# Allegro board DOEON_PCBv2.brd
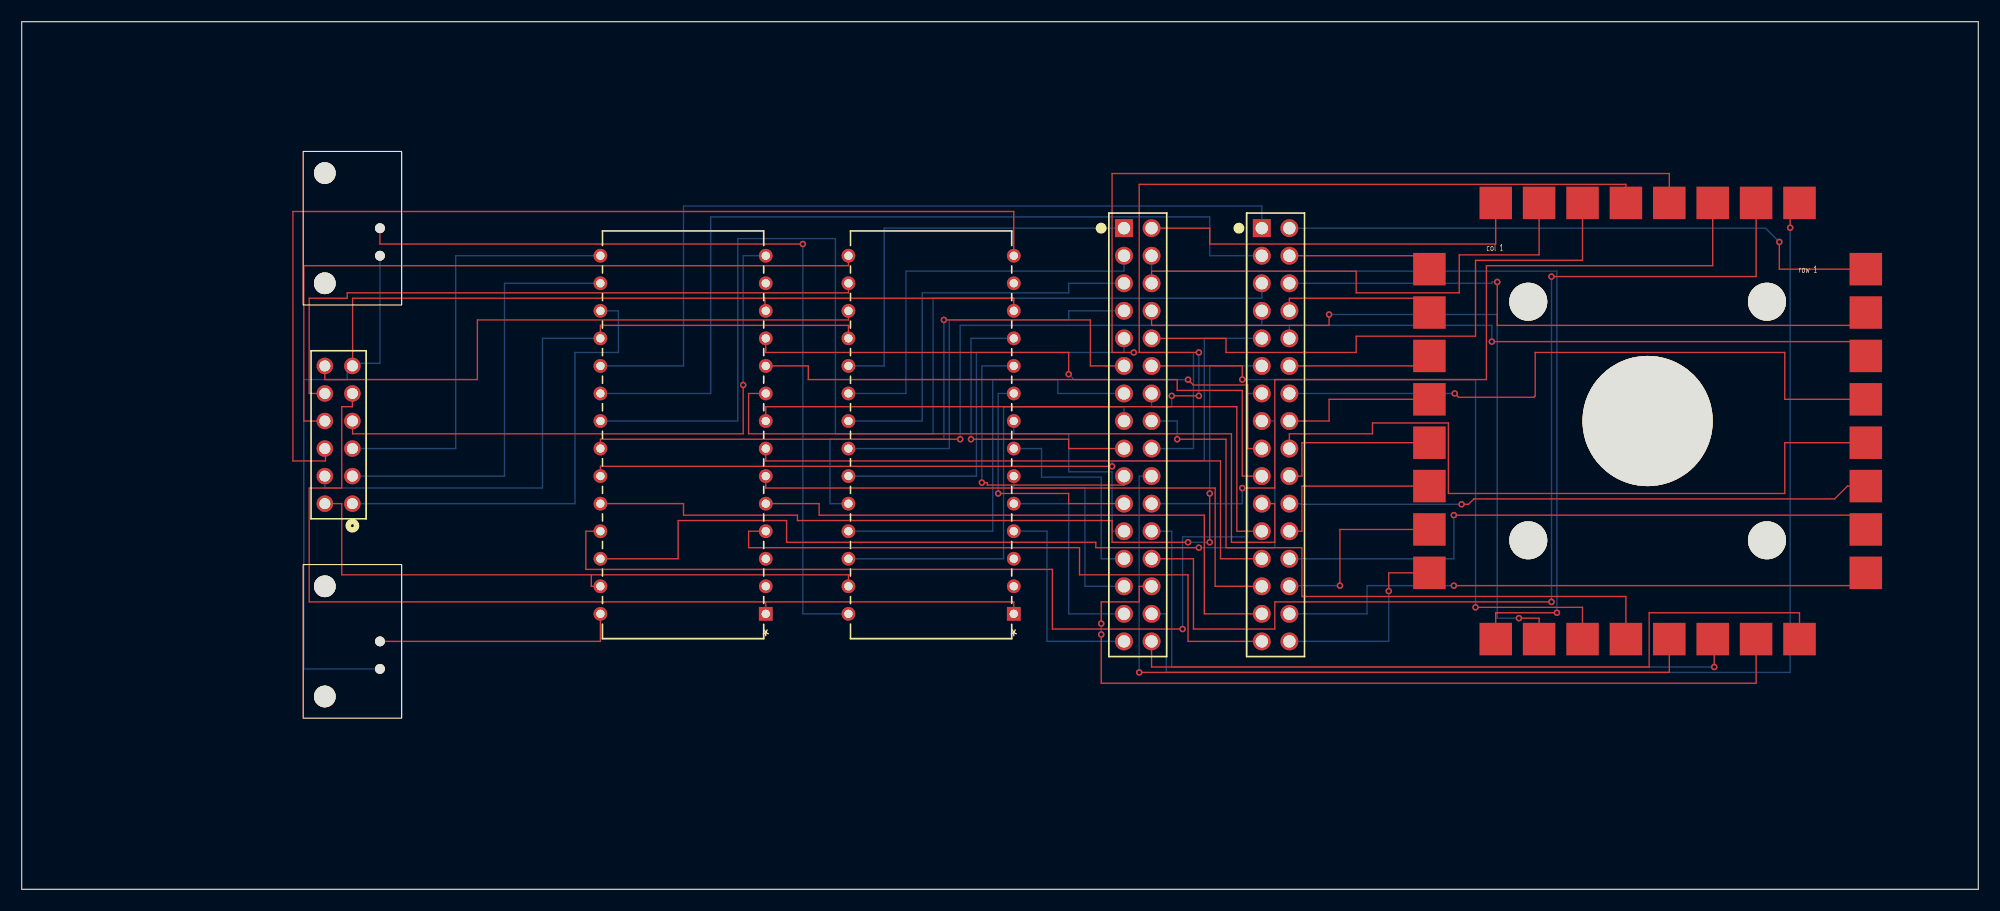
[diagram p0: board, top side]
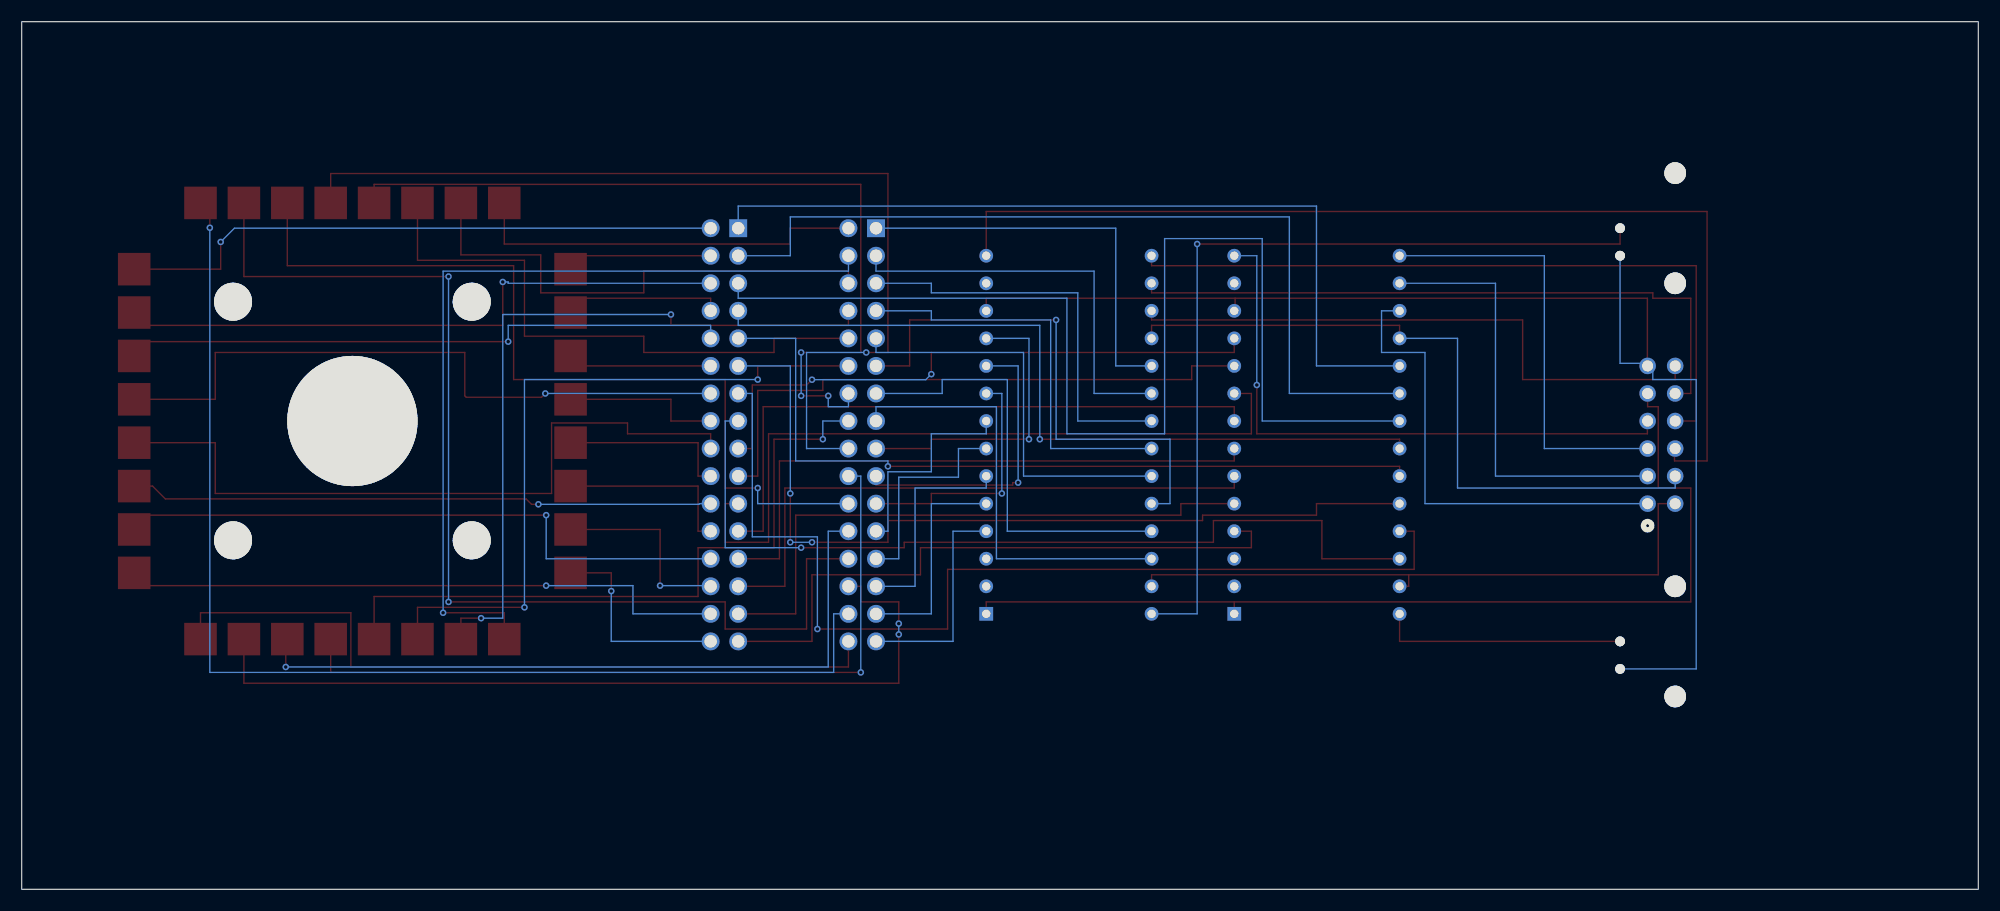
[diagram p1: board, bottom side, seen from below]

Outline 180.34 x 80 mm; copper layers: TOP, BOTTOM. Coordinates in mm from the lower left corner of the outline.
Outline path: rectangle 0,0 180.34,80

## Design rules (mm)
constraint set DEFAULT: min track width 0.127

## Placement (name value [footprint] x y rotation side)
J1  67997-212HLF  [12PINS]  30.48 35.56 90 top
J2  -  [TSW-116-07-G-D]  114.3 60.96 270 top
J3  -  [TSW-116-07-G-D]  101.6 60.96 270 top
SAMPLE1  sample_holder  [SAMPLE_MOUNT]  149.86 43.18 0 top
U1  MAX396EPI  [21-0044B_28]  68.58 25.4 180 top
U2  MAX396EPI  [21-0044B_28]  91.44 25.4 180 top
VBI1  VBI211  [BNC_YB]  27.94 27.94 90 top
VBI2  VBI211  [BNC_YB]  27.94 66.04 90 top

## Library data of the parts
J1 = 67997-212HLF: User Part Number: PN; Tolerance: TOL
J2 J3 = TSW-116-07-G-D: User Part Number: PN; Tolerance: TOL
SAMPLE1 = sample_holder
U1 U2 = MAX396EPI: User Part Number: PN; Tolerance: TOL
VBI1 VBI2 = VBI211

## Footprints (pads in the part's own frame, mm; a bottom-side part is the same pattern mirrored in y, then rotated)
12PINS
  round 1.524 hole 1.016: A1(0,0) A2(2.54,0) A3(5.08,0) A4(7.62,0) A5(10.16,0) A6(12.7,0) B1(0,2.54) B2(2.54,2.54) B3(5.08,2.54) B4(7.62,2.54) B5(10.16,2.54) B6(12.7,2.54)
21-0044B_28
  rect 1.27x1.27 hole 0.762: 1(0,0)
  round 1.27 hole 0.762: 2(0,-2.54) 3(0,-5.08) 4(0,-7.62) 5(0,-10.16) 6(0,-12.7) 7(0,-15.24) 8(0,-17.78) 9(0,-20.32) 10(0,-22.86) 11(0,-25.4) 12(0,-27.94) 13(0,-30.48) 14(0,-33.02) 15(15.24,-33.02) 16(15.24,-30.48) 17(15.24,-27.94) 18(15.24,-25.4) 19(15.24,-22.86) 20(15.24,-20.32) 21(15.24,-17.78) 22(15.24,-15.24) 23(15.24,-12.7) 24(15.24,-10.16) 25(15.24,-7.62) 26(15.24,-5.08) 27(15.24,-2.54) 28(15.24,0)
BNC_YB
  round 0.9 hole 0.9: 1(-7.62,-5.08) 2(-5.08,-5.08)
  round 2 hole 2: 3(-10.16,0) 4(0,0)
SAMPLE_MOUNT
  rect 3x3 smd: 1(20.11,14) 2(-20.11,14) 3(20.11,10) 4(-20.11,10) 5(20.11,6) 6(-20.11,6) 7(20.11,2) 8(-20.11,2) 9(20.11,-2) 10(-20.11,-2) 11(20.11,-6) 12(-20.11,-6) 13(20.11,-10) 14(-20.11,-10) 15(20.11,-14) 16(-20.11,-14) 17(-14,20.11) 18(-14,-20.11) 19(-10,20.11) 20(-10,-20.11) 21(-6,20.11) 22(-6,-20.11) 23(-2,20.11) 24(-2,-20.11) 25(2,20.11) 26(2,-20.11) 27(6,20.11) 28(6,-20.11) 29(10,20.11) 30(10,-20.11) 31(14,20.11) 32(14,-20.11)
  round 3.5 hole 3.5: 33(-11,11) 34(11,11) 35(-11,-11) 36(11,-11)
  round 12 hole 12: 37(0,0)
TSW-116-07-G-D
  rect 1.651x1.651 hole 1.143: 1(0,0)
  round 1.651 hole 1.143: 2(0,2.54) 3(2.54,0) 4(2.54,2.54) 5(5.08,0) 6(5.08,2.54) 7(7.62,0) 8(7.62,2.54) 9(10.16,0) 10(10.16,2.54) 11(12.7,0) 12(12.7,2.54) 13(15.24,0) 14(15.24,2.54) 15(17.78,0) 16(17.78,2.54) 17(20.32,0) 18(20.32,2.54) 19(22.86,0) 20(22.86,2.54) 21(25.4,0) 22(25.4,2.54) 23(27.94,0) 24(27.94,2.54) 25(30.48,0) 26(30.48,2.54) 27(33.02,0) 28(33.02,2.54) 29(35.56,0) 30(35.56,2.54) 31(38.1,0) 32(38.1,2.54)

## Nets
GND: J1.A6 U1.12 U2.12 VBI1.1 VBI2.1
COL_1: J3.1 U2.19
COL_2: J3.3 U2.20
COL_3: J3.5 U2.21
COL_4: J3.7 U2.22
COL_5: J3.9 U2.23
COL_6: J3.11 U2.24
COL_7: J3.13 U2.25
COL_8: J3.15 U2.26
COL_9: J3.17 U2.11
COL_10: J3.19 U2.10
COL_11: J3.21 U2.9
COL_12: J3.23 U2.8
COL_13: J3.25 U2.7
COL_14: J3.27 U2.6
COL_15: J3.29 U2.5
COL_16: J3.31 U2.4
COL_A0: J1.B6 U2.17
COL_A1: J1.B5 U2.16
COL_A2: J1.B4 U2.15
COL_A3: J1.B3 U2.14
EN: J1.B2 U1.18 U2.18
H_COL1: J3.2 SAMPLE1.17
H_COL2: J3.4 SAMPLE1.18
H_COL3: J3.6 SAMPLE1.19
H_COL4: J3.8 SAMPLE1.20
H_COL5: J3.10 SAMPLE1.21
H_COL6: J3.12 SAMPLE1.22
H_COL7: J3.14 SAMPLE1.23
H_COL8: J3.16 SAMPLE1.24
H_COL9: J3.18 SAMPLE1.25
H_COL10: J3.20 SAMPLE1.26
H_COL11: J3.22 SAMPLE1.27
H_COL12: J3.24 SAMPLE1.28
H_COL13: J3.26 SAMPLE1.29
H_COL14: J3.28 SAMPLE1.30
H_COL15: J3.30 SAMPLE1.31
H_COL16: J3.32 SAMPLE1.32
H_ROW1: J2.2 SAMPLE1.1
H_ROW2: J2.4 SAMPLE1.2
H_ROW3: J2.6 SAMPLE1.3
H_ROW4: J2.8 SAMPLE1.4
H_ROW5: J2.10 SAMPLE1.5
H_ROW6: J2.12 SAMPLE1.6
H_ROW7: J2.14 SAMPLE1.7
H_ROW8: J2.16 SAMPLE1.8
H_ROW9: J2.18 SAMPLE1.9
H_ROW10: J2.20 SAMPLE1.10
H_ROW11: J2.22 SAMPLE1.11
H_ROW12: J2.24 SAMPLE1.12
H_ROW13: J2.26 SAMPLE1.13
H_ROW14: J2.28 SAMPLE1.14
H_ROW15: J2.30 SAMPLE1.15
H_ROW16: J2.32 SAMPLE1.16
PULSE_IN: U1.28 VBI1.2(I_O)
PULSE_OUT: U2.28 VBI2.2(I_O)
ROW_1: J2.1 U1.19
ROW_2: J2.3 U1.20
ROW_3: J2.5 U1.21
ROW_4: J2.7 U1.22
ROW_5: J2.9 U1.23
ROW_6: J2.11 U1.24
ROW_7: J2.13 U1.25
ROW_8: J2.15 U1.26
ROW_9: J2.17 U1.11
ROW_10: J2.19 U1.10
ROW_11: J2.21 U1.9
ROW_12: J2.23 U1.8
ROW_13: J2.25 U1.7
ROW_14: J2.27 U1.6
ROW_15: J2.29 U1.5
ROW_16: J2.31 U1.4
ROW_A0: J1.A1 U1.17
ROW_A1: J1.A2 U1.16
ROW_A2: J1.A3 U1.15
ROW_A3: J1.A4 U1.14
V+: J1.A5 U1.1 U2.1
V-: J1.B1 U1.27(V-) U2.27(V-)

Pads without a net: SAMPLE1 33 34 35 36 37; U1 2 3 13; U2 2 3 13; VBI1 3 4; VBI2 3 4

## Via types
v1: diameter 0.61, hole 0.33, TOP to BOTTOM, 42 vias

## Routing (per net, layer and track width the routed paths; a pad name or vN(x,y) marks a point on that pad's centre or on a via; arc(x,y) is an arc through that point)
GND: length 121.7
  TOP w0.127: 68.5,54.5 91.44,54.5 U2.12 ; 68.5,54.5 30.5,54.5 30.5,48.26 J1.A6 ; 68.5,54.5 68.5,53.34 U1.12
  BOTTOM w0.127: VBI2.1 33.02,48.5 30.48,48.5 J1.A6 30,48.26 30,47 26,47 26,20.32 VBI1.1
COL_1: length 38.1
  BOTTOM w0.127: J3.1 79.5,60.96 79.5,48.26 U2.19
COL_2: length 38.1
  BOTTOM w0.127: U2.20 81.5,45.72 81.5,57 101.6,57 J3.3
COL_3: length 38.1
  BOTTOM w0.127: U2.21 83,43.18 83,55 96.5,55 96.5,55.88 J3.5
COL_4: length 38.1
  BOTTOM w0.127: J3.7 96.5,53.34 96.5,52.5 85.5,52.5 85.5,40.64 U2.22
COL_5: length 38.1
  BOTTOM w0.127: J3.9 101.6,49.5 88,49.5 88,38.1 U2.23
COL_6: length 50
  TOP w0.127: v1(85,52.5) 98.5,52.5 98.5,48.26 J3.11
  BOTTOM w0.127: U2.24 74.5,35.56 74.5,41.5 85,41.5 v1(85,52.5)
COL_7: length 40.7
  BOTTOM w0.127: U2.25 89.5,33.02 89.5,47 95.5,47 95.5,45.72 J3.13
COL_8: length 40.7
  BOTTOM w0.127: J3.15 101.6,44.5 90.5,44.5 90.5,30.48 U2.26
COL_9: length 28.2
  TOP w0.127: v1(87.5,41.5) 96.5,41.5 96.5,40.64 J3.17
  BOTTOM w0.127: v1(87.5,41.5) 87.5,50.8 U2.11
COL_10: length 27.9
  TOP w0.127: v1(88.5,37.5) 89,37.5 89,37.27 101.6,37.27 J3.19
  BOTTOM w0.127: U2.10 88.5,48.26 v1(88.5,37.5)
COL_11: length 23.2
  TOP w0.127: v1(90,36.5) 96.5,36.5 96.5,35.56 J3.21
  BOTTOM w0.127: U2.9 90,45.72 v1(90,36.5)
COL_12: length 20.3
  BOTTOM w0.127: U2.8 91.44,42 96.5,42 96.5,38.5 100.5,38.5 100.5,33.02 J3.23
COL_13: length 20.3
  BOTTOM w0.127: J3.25 99.5,30.48 99.5,38 94,38 94,40.64 U2.7
COL_14: length 20.3
  BOTTOM w0.127: J3.27 98,27.94 98,37 91.44,37 U2.6
COL_15: length 20.3
  BOTTOM w0.127: J3.29 96.5,25.4 96.5,35.56 U2.5
COL_16: length 20.3
  BOTTOM w0.127: J3.31 94.5,22.86 94.5,33.02 U2.4
COL_A0: length 55.9
  TOP w0.127: J1.B6 27.94,47 42,47 42,52.5 76.2,52.5 U2.17
COL_A1: length 61.3
  TOP w0.127: J1.B5 26.5,45.72 26.5,54.5 30,54.5 30,55 76.2,55 U2.16
COL_A2: length 67.4
  TOP w0.127: U2.15 76.2,57.5 26,57.5 26,43.18 J1.B4
COL_A3: length 97.7
  TOP w0.127: U2.14 91.44,62.5 25,62.5 25,39.5 28,39.5 28,40.64 J1.B3
EN: length 65.6
  TOP w0.127: U1.18 53.34,52 76.2,52 U2.18
  BOTTOM w0.127: J1.B2 27.94,37 48,37 48,50.8 U1.18
H_COL1: length 37
  TOP w0.127: SAMPLE1.17 135.86,59.5 109.5,59.5 109.5,60.96 J3.2
H_COL2: length 78.3
  TOP w0.127: v1(141.5,25.5) 135.86,25.5 SAMPLE1.18
  BOTTOM w0.127: J3.4 104.14,57 141.5,57 v1(141.5,25.5)
H_COL3: length 47.1
  TOP w0.127: J3.6 104.14,57 123,57 123,55 132.5,55 132.5,58.5 139.86,58.5 SAMPLE1.19
H_COL4: length 68
  TOP w0.127: SAMPLE1.20 139.86,25 v1(138,25) ; v1(120.5,53) 120.5,52 104.14,52 J3.8
  BOTTOM w0.127: v1(138,25) 136,25 136,53 v1(120.5,53)
H_COL5: length 54.8
  TOP w0.127: J3.10 111,50.8 111,49.5 123,49.5 123,51 134,51 134,58 143.86,58 SAMPLE1.21
H_COL6: length 64.9
  TOP w0.127: SAMPLE1.22 143.86,26 v1(134,26) ; v1(112.5,47) 112.5,48.26 J3.12
  BOTTOM w0.127: v1(112.5,47) 134,47 v1(134,26)
H_COL7: length 78.2
  TOP w0.127: v1(108.5,49.5) 103,49.5 103,65 147.86,65 SAMPLE1.23 ; v1(108.5,45.5) v1(106,45.5)
  BOTTOM w0.127: v1(108.5,49.5) v1(108.5,45.5) ; v1(106,45.5) 106,44.5 104.14,44.5 J3.14
H_COL8: length 63.8
  TOP w0.127: SAMPLE1.24 147.86,27 118,27 118,31.5 111,31.5 111,41.5 v1(106.5,41.5)
  BOTTOM w0.127: v1(106.5,41.5) 106.5,43.18 J3.16
H_COL9: length 90.8
  TOP w0.127: v1(102.5,49.5) 100.5,49.5 100.5,66 151.86,66 SAMPLE1.25
  BOTTOM w0.127: J3.18 108,40.64 108,49.5 v1(102.5,49.5)
H_COL10: length 71.2
  TOP w0.127: v1(103,20) 151.86,20 SAMPLE1.26
  BOTTOM w0.127: v1(103,20) 103,38.1 J3.20
H_COL11: length 79.5
  TOP w0.127: SAMPLE1.27 155.86,57.5 135,57.5 135,47 115.5,47 115.5,37 v1(112.5,37)
  BOTTOM w0.127: J3.22 112.5,35.56 v1(112.5,37)
H_COL12: length 67.1
  TOP w0.127: v1(156,20.5) 156,23.07 SAMPLE1.28
  BOTTOM w0.127: J3.24 106,33.02 106,20.5 v1(156,20.5)
H_COL13: length 101.5
  TOP w0.127: J3.26 108,30.48 108,24 115.5,24 115.5,26.5 v1(141,26.5) ; v1(141,56.5) 159.86,56.5 SAMPLE1.29
  BOTTOM w0.127: v1(141,56.5) v1(141,26.5)
H_COL14: length 78
  TOP w0.127: v1(99.5,24.5) 99.5,26.5 103,26.5 103,27.94 J3.28 ; SAMPLE1.30 159.86,19 99.5,19 v1(99.5,23.5)
  BOTTOM w0.127: v1(99.5,23.5) v1(99.5,24.5)
H_COL15: length 108.4
  TOP w0.127: v1(163,61) 163,63.29 SAMPLE1.31
  BOTTOM w0.127: J3.30 105.5,25.4 105.5,20 163,20 v1(163,61)
H_COL16: length 69.5
  TOP w0.127: J3.32 104.14,20.5 150,20.5 150,25.5 163.86,25.5 SAMPLE1.32
H_ROW1: length 56.2
  TOP w0.127: SAMPLE1.1 162,57.18 v1(162,59.69)
  BOTTOM w0.127: v1(162,59.69) 160.73,60.96 J2.2
H_ROW2: length 14.1
  TOP w0.127: J2.4 129.75,58.42 SAMPLE1.2
H_ROW3: length 58.4
  TOP w0.127: SAMPLE1.3 169.97,52 136,52 v1(136,56)
  BOTTOM w0.127: J2.6 135.5,55.88 135.5,56 v1(136,56)
H_ROW4: length 15.4
  TOP w0.127: J2.8 116.84,54.5 129.75,54.5 SAMPLE1.4
H_ROW5: length 57.1
  TOP w0.127: v1(135.5,50.5) 169.97,50.5 SAMPLE1.5
  BOTTOM w0.127: J2.10 116.84,52 135.5,52 v1(135.5,50.5)
H_ROW6: length 13.8
  TOP w0.127: SAMPLE1.6 129.75,48.26 J2.12
H_ROW7: length 61.6
  TOP w0.127: SAMPLE1.7 162.5,45.18 162.5,49.5 139.5,49.5 139.5,45.5 139.37,45.37 132.43,45.37 v1(132.08,45.72)
  BOTTOM w0.127: J2.14 v1(132.08,45.72)
H_ROW8: length 14.9
  TOP w0.127: J2.16 120.5,43.18 120.5,45.18 SAMPLE1.8
H_ROW9: length 66.7
  TOP w0.127: SAMPLE1.9 162.5,41.18 162.5,36.5 131.5,36.5 131.5,43 124.5,43 124.5,42 116.84,42 J2.18
H_ROW10: length 16
  TOP w0.127: J2.20 118,38.1 118,41.18 SAMPLE1.10
H_ROW11: length 53.9
  TOP w0.127: v1(132.72,35.5) 133.35,35.5 133.85,36 167.1,36 168.28,37.18 SAMPLE1.11
  BOTTOM w0.127: J2.22 117.86,35.56 117.92,35.5 v1(132.72,35.5)
H_ROW12: length 17.1
  TOP w0.127: SAMPLE1.12 118,37.18 118,33.02 J2.24
H_ROW13: length 58.5
  TOP w0.127: v1(132,34.5) 169.97,34.5 SAMPLE1.13
  BOTTOM w0.127: v1(132,34.5) 132,30.48 J2.26
H_ROW14: length 18.1
  TOP w0.127: SAMPLE1.14 121.5,33.18 v1(121.5,28)
  BOTTOM w0.127: v1(121.5,28) 116.84,28 J2.28
H_ROW15: length 56.9
  TOP w0.127: v1(132,28) 169.97,28 SAMPLE1.15
  BOTTOM w0.127: v1(132,28) 124,28 124,25.4 J2.30
H_ROW16: length 19.2
  TOP w0.127: v1(126,27.5) 126,29.18 SAMPLE1.16
  BOTTOM w0.127: v1(126,27.5) 126,22.86 J2.32
PULSE_IN: length 22.9
  TOP w0.127: U1.28 53.34,22.86 VBI1.2
PULSE_OUT: length 78.7
  TOP w0.127: v1(72,59.5) 33.02,59.5 VBI2.2
  BOTTOM w0.127: v1(72,59.5) 72,25.4 U2.28
ROW_1: length 77.7
  BOTTOM w0.127: U1.19 61,48.26 61,63 114.3,63 J2.1
ROW_2: length 80.8
  BOTTOM w0.127: U1.20 63.5,45.72 63.5,62 109.5,62 109.5,58.42 J2.3
ROW_3: length 109.7
  BOTTOM w0.127: U1.21 66,43.18 66,60 75,60 75,42 84,42 84,54.5 114.3,54.5 J2.5
ROW_4: length 73.7
  TOP w0.127: U1.22 53.34,41.5 v1(86.5,41.5)
  BOTTOM w0.127: v1(86.5,41.5) 86.5,52 114.3,52 J2.7
ROW_5: length 73.7
  TOP w0.127: v1(100.5,39) 53.34,39 U1.23
  BOTTOM w0.127: v1(100.5,39) 100.5,39.5 109,39.5 109,50.8 J2.9
ROW_6: length 80.8
  TOP w0.127: v1(109.5,36.5) v1(109.5,32) ; U1.24 61,35.56 61,34.5 71.5,34.5 71.5,34 100.5,34 100.5,32 v1(107.5,32)
  BOTTOM w0.127: v1(109.5,32) v1(107.5,32) ; v1(109.5,36.5) 109.5,48.26 J2.11
ROW_7: length 94.4
  TOP w0.127: v1(107,24) 95,24 95,29.5 52,29.5 52,33.02 U1.25
  BOTTOM w0.127: J2.13 113,45.72 113,32.5 107,32.5 v1(107,24)
ROW_8: length 81.1
  TOP w0.127: v1(108.5,31.5) 99,31.5 99,32 70.5,32 70.5,34 60.5,34 60.5,30.48 U1.26
  BOTTOM w0.127: v1(108.5,31.5) 115.5,31.5 115.5,43.18 J2.15
ROW_9: length 55.3
  TOP w0.127: J2.17 113,40.64 113,46.5 107.99,46.5 v1(107.5,46.99) ; U1.11 68.58,49.5 96.5,49.5 v1(96.5,47.5)
  BOTTOM w0.127: v1(96.5,47.5) 97.01,46.99 v1(107.5,46.99)
ROW_10: length 55.9
  TOP w0.127: U1.10 72.5,48.26 72.5,47 106.5,47 106.5,46 112.5,46 112.5,38.1 J2.19
ROW_11: length 68.6
  TOP w0.127: J2.21 115.5,35.56 115.5,32 111.5,32 111.5,42 67,42 67,45.72 U1.9
ROW_12: length 58.5
  TOP w0.127: U1.8 68.58,44.5 112,44.5 112,33.02 J2.23
ROW_13: length 55.9
  TOP w0.127: U1.7 68.58,39.5 110.5,39.5 110.5,30.48 J2.25
ROW_14: length 55.9
  TOP w0.127: U1.6 68.58,37 110,37 110,27.94 J2.27
ROW_15: length 55.9
  TOP w0.127: U1.5 73.5,35.56 73.5,34.5 109,34.5 109,25.4 J2.29
ROW_16: length 59
  TOP w0.127: U1.4 67,33.02 67,31.5 97.5,31.5 97.5,29 107.5,29 107.5,22.86 J2.31
ROW_A0: length 44
  BOTTOM w0.127: J1.A1 51,35.56 51,49.5 55,49.5 55,53.34 U1.17
ROW_A1: length 40.6
  BOTTOM w0.127: U1.16 44.5,55.88 44.5,38.1 J1.A2
ROW_A2: length 40.6
  BOTTOM w0.127: J1.A3 40,40.64 40,58.42 U1.15
ROW_A3: length 55.7
  TOP w0.127: J1.A4 30.5,43.18 30.5,42 66.5,42 v1(66.5,46.5)
  BOTTOM w0.127: U1.14 66.5,58.42 v1(66.5,46.5)
V+: length 90.3
  TOP w0.127: J1.A5 30.48,44.5 29.5,44.5 29.5,37 26.5,37 26.5,26.5 68.58,26.5 ; U1.1 68.58,26.5 ; 68.58,26.5 91.44,26.5 U2.1
V-: length 57.8
  TOP w0.127: U1.27 52.5,27.94 52.5,29 ; J1.B1 29.5,35.56 29.5,29 52.5,29 ; 52.5,29 76.2,29 U2.27
